# EAGLE board Exquisite Gogo-Uusam (EAGLE 9.7.0)

Size 430.02 x 255.89 mm. Coordinates in mm from the lower left corner, seen from the top.
Outline: 0,0 430.02,0 430.02,255.89 0,255.89 0,0
Copper layers (1*16): Top 0.035mm / dielectric 1.5mm / Bottom 0.035mm
Design rules "default": minimum track width 6mil, minimum drill 0.35mm, track to track 6mil, track to pad 6mil, pad to pad 6mil, via to via 6mil, smd to smd 6mil, copper to edge 40mil, drill to drill 6mil, minimum pad ring 10mil, minimum via ring 8mil, stop-mask expansion 4mil, vias tented up to drill 0mil, thermal gap 10mil

## Footprints (pad centres in the part's own frame; a part is rotated, then mirrored left to right if it is on the bottom)
LEDRD254W60D565H860B = drill 0.981 pad 1.581: 1 -1.27,0; 2 1.27,0
LEDRD254W60D565H860B_Y = drill 0.981 pad 1.581: 1 -1.27,0; 2 1.27,0
LEDRD254W60D565H860B_G = drill 0.981 pad 1.581: 1 -1.27,0; 2 1.27,0
RESAD1016W63L850D250B = drill 0.83 pad 1.43: 1 -5.08,0; 2 5.08,0
SWITCH-MOMENTARY-PTH-6.5MM = drill 1.016 pad 1.88: 1 -3.251,2.261; 2 3.251,2.261; 3 -3.251,-2.261; 4 3.251,-2.261
ARDUINO-UNO-R3-SHIELD = drill 1.016 pad 1.88: 3.3V 24.13,-2.54; 5V 24.13,0; A0 24.13,12.7; A1 24.13,15.24; A2 24.13,17.78; A3 24.13,20.32; A4 24.13,22.86; A5 24.13,25.4; AREF -24.13,-13.97; D2 -24.13,20.32; D3 -24.13,17.78; D4 -24.13,15.24; D5 -24.13,12.7; D6 -24.13,10.16; D7 -24.13,7.62; D8 -24.13,3.81; D9 -24.13,1.27; D10 -24.13,-1.27; D11 -24.13,-3.81; D12 -24.13,-6.35; D13 -24.13,-8.89; GND@0 24.13,2.54; GND@1 24.13,5.08; GND@2 -24.13,-11.43; IOREF 24.13,-7.62; NC 24.13,-10.16; RES 24.13,-5.08; RX -24.13,25.4; SCL -24.13,-19.05; SDA -24.13,-16.51; TX -24.13,22.86; VIN 24.13,7.62

## Placement (x,y rotation side)
D1  RED  [LEDRD254W60D565H860B]  29.4,247.98 180 top
D2  RED  [LEDRD254W60D565H860B]  29.4,242.9 180 top
D3  RED  [LEDRD254W60D565H860B]  356.22,90.08 180 top
D4  RED  [LEDRD254W60D565H860B]  371.46,90.08 180 top
D5  RED  [LEDRD254W60D565H860B]  386.7,90.08 180 top
D6  RED  [LEDRD254W60D565H860B]  372.01,244.74 180 top
D7  RED  [LEDRD254W60D565H860B]  14.92,89.38 180 top
D8  YELLOW  [LEDRD254W60D565H860B_Y]  30.16,89.38 180 top
D11  GREEN  [LEDRD254W60D565H860B_G]  45.4,89.38 180 top
D12  RED  [LEDRD254W60D565H860B]  194.81,91.26 180 top
D13  RED  [LEDRD254W60D565H860B]  210.05,91.26 180 top
D14  RED  [LEDRD254W60D565H860B]  225.29,91.26 180 top
R1  1k  [RESAD1016W63L850D250B]  35.75,240.36 0 top
R2  1k  [RESAD1016W63L850D250B]  194.33,245.24 0 top
R3  1k  [RESAD1016W63L850D250B]  362.57,87.54 0 top
R4  1k  [RESAD1016W63L850D250B]  377.81,87.54 0 top
R5  1k  [RESAD1016W63L850D250B]  393.05,87.54 0 top
R6  10k  [RESAD1016W63L850D250B]  419.22,15.88 90 top
R7  1k  [RESAD1016W63L850D250B]  36.51,86.84 0 top
R10  1k  [RESAD1016W63L850D250B]  51.75,86.84 0 top
R11  1k  [RESAD1016W63L850D250B]  201.16,88.72 0 top
R12  1k  [RESAD1016W63L850D250B]  216.4,88.72 0 top
R13  1k  [RESAD1016W63L850D250B]  231.64,88.72 0 top
S2  SWITCH_MOMENTARY  [SWITCH-MOMENTARY-PTH-6.5MM]  421.76,29.84 90 top
U1  ARDUINO-UNO-R3-SHIELD  [ARDUINO-UNO-R3-SHIELD]  57.83,195.7 270 top
U2  ARDUINO-UNO-R3-SHIELD  [ARDUINO-UNO-R3-SHIELD]  219.76,193.46 270 top
U3  ARDUINO-UNO-R3-SHIELD  [ARDUINO-UNO-R3-SHIELD]  389.6,187.04 270 top
U4  ARDUINO-UNO-R3-SHIELD  [ARDUINO-UNO-R3-SHIELD]  47.88,31.69 270 top
U6  ARDUINO-UNO-R3-SHIELD  [ARDUINO-UNO-R3-SHIELD]  228.17,34.74 270 top
UF  ARDUINO-UNO-R3-SHIELD  [ARDUINO-UNO-R3-SHIELD]  385.95,29.84 270 top

## Library data of the parts
D1-D7 D12-D14 = Tinkercad; CATEGORY: Opto-Electronic; SUB-CATEGORY: LED; VALUE: LED_RED
D8 = Tinkercad; CATEGORY: Opto-Electronic; SUB-CATEGORY: LED; VALUE: LED_YELLOW
D11 = Tinkercad; CATEGORY: Opto-Electronic; SUB-CATEGORY: LED; VALUE: LED_GREEN
R1-R7 R10-R13 S2 U1-U4 U6 UF = Tinkercad

## Nets
D2_A: D1.1 D2.1 R1.1
D3_A: D3.1 R2.1
D3_A: D3.1 R3.1
D4_A: D4.1 R4.1
D5_A: D5.1 R5.1
D6_A: D6.1 R5.1
D7_A: D7.1 R6.1
D8_A: D8.1 R7.1
D11_A: D11.1 R10.1
D12_A: D12.1 R11.1
D13_A: D13.1 R12.1
D14_A: D14.1 R13.1
U1_D8: R1.2 U1.D8
U1_GND: D1.2 D2.2 U1.GND@0 U1.GND@1 U1.GND@2
U2_D7: R2.2 U2.D7
U2_D8: R3.2 U2.D8
U2_GND: D3.2 D4.2 U2.GND@0 U2.GND@1 U2.GND@2
U3_D7: R4.2 U3.D7
U3_D8: R5.2 U3.D8
U3_GND: D5.2 D6.2 U3.GND@0 U3.GND@1 U3.GND@2
U4_D7: R6.2 U4.D7
U4_D8: R7.2 U4.D8
U4_D13: R10.2 U4.D13
U4_GND: D7.2 D8.2 D11.2 U4.GND@0 U4.GND@1 U4.GND@2
U6_D7: R11.2 U6.D7
U6_D8: R12.2 U6.D8
U6_D13: R13.2 U6.D13
U6_GND: D12.2 D13.2 D14.2 U6.GND@0 U6.GND@1 U6.GND@2
UF_5V: S2.3 UF.5V
UF_D2: R6.2 S2.1 S2.2 UF.D2
UF_D7: R3.2 UF.D7
UF_D8: R4.2 UF.D8
UF_D13: R5.2 UF.D13
UF_GND: D3.2 D4.2 D5.2 R6.1 UF.GND@0 UF.GND@1 UF.GND@2

## Tracks (layer width: path | path; a pad name or v marks a point on that pad's centre or on a via)
D2_A  (2 unrouted)
D3_A  (1 unrouted)
D3_A  (1 unrouted)
D4_A  (1 unrouted)
D5_A  (1 unrouted)
D6_A  (1 unrouted)
D7_A  (1 unrouted)
D8_A  (1 unrouted)
D11_A  (1 unrouted)
D12_A  (1 unrouted)
D13_A  (1 unrouted)
D14_A  (1 unrouted)
U1_D8  (1 unrouted)
U1_GND  (4 unrouted)
U2_D7  (1 unrouted)
U2_D8  (1 unrouted)
U2_GND  (4 unrouted)
U3_D7  (1 unrouted)
U3_D8  (1 unrouted)
U3_GND  (4 unrouted)
U4_D7  (1 unrouted)
U4_D8  (1 unrouted)
U4_D13  (1 unrouted)
U4_GND  (5 unrouted)
U6_D7  (1 unrouted)
U6_D8  (1 unrouted)
U6_D13  (1 unrouted)
U6_GND  (5 unrouted)
UF_5V  (1 unrouted)
UF_D2  (3 unrouted)
UF_D7  (1 unrouted)
UF_D8  (1 unrouted)
UF_D13  (1 unrouted)
UF_GND  (6 unrouted)